# Altium PCB asincronico.PcbDoc
Units mm, origin at the board's own origin, x right, y up, seen from the top; angles counter-clockwise.
Board outline 50.13 x 50.13 mm, 2 copper layers (Top Layer, Bottom Layer); 4 components, 9 nets, 34 pads, 6 vias.
Unrouted connection lines stored in the file: 2.
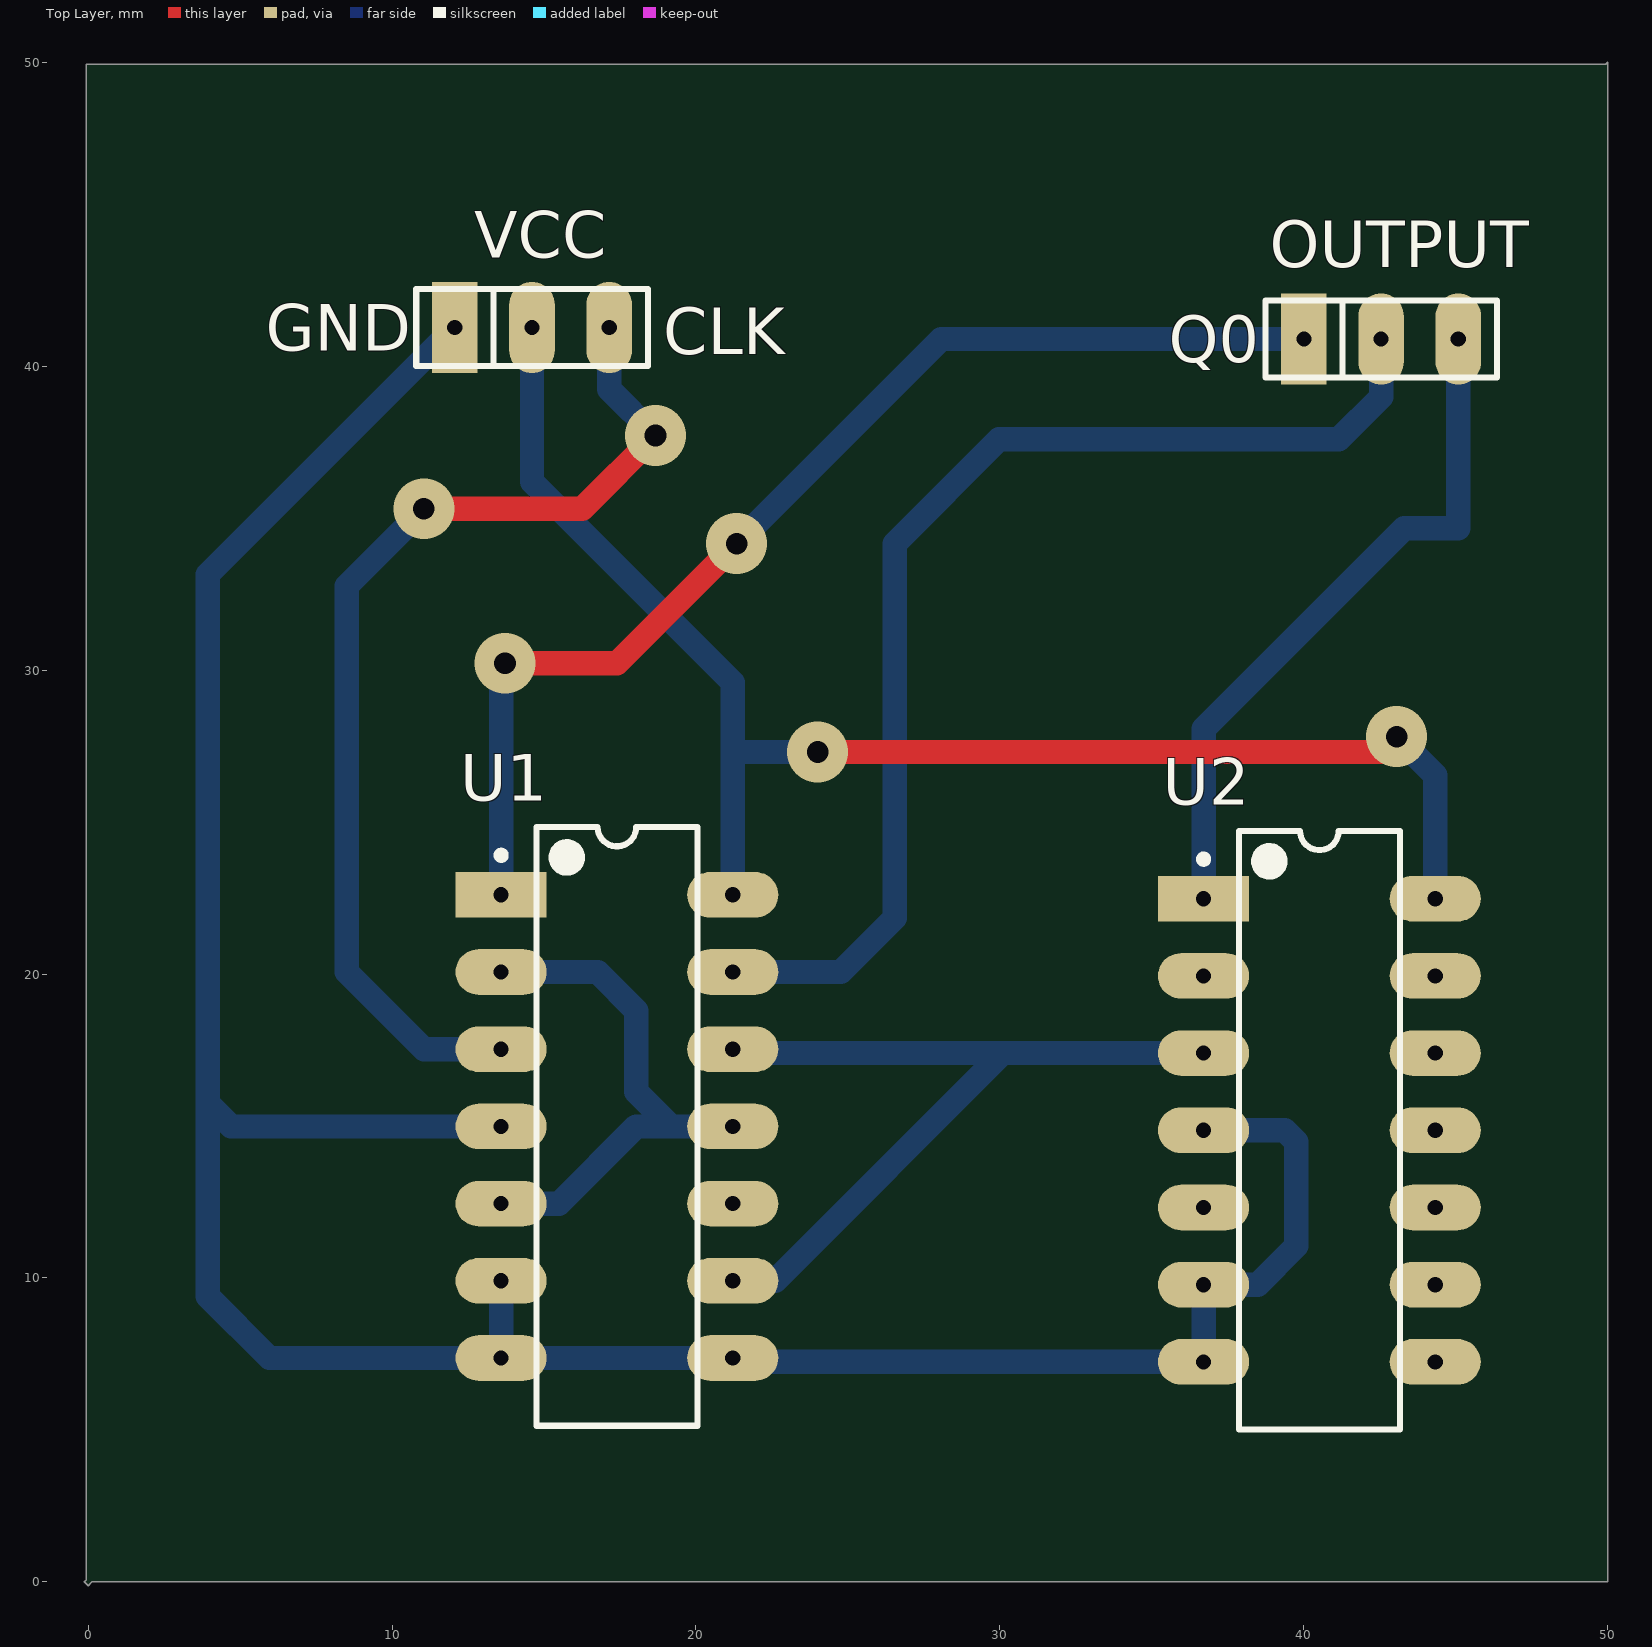
[diagram p0: Top Layer view]
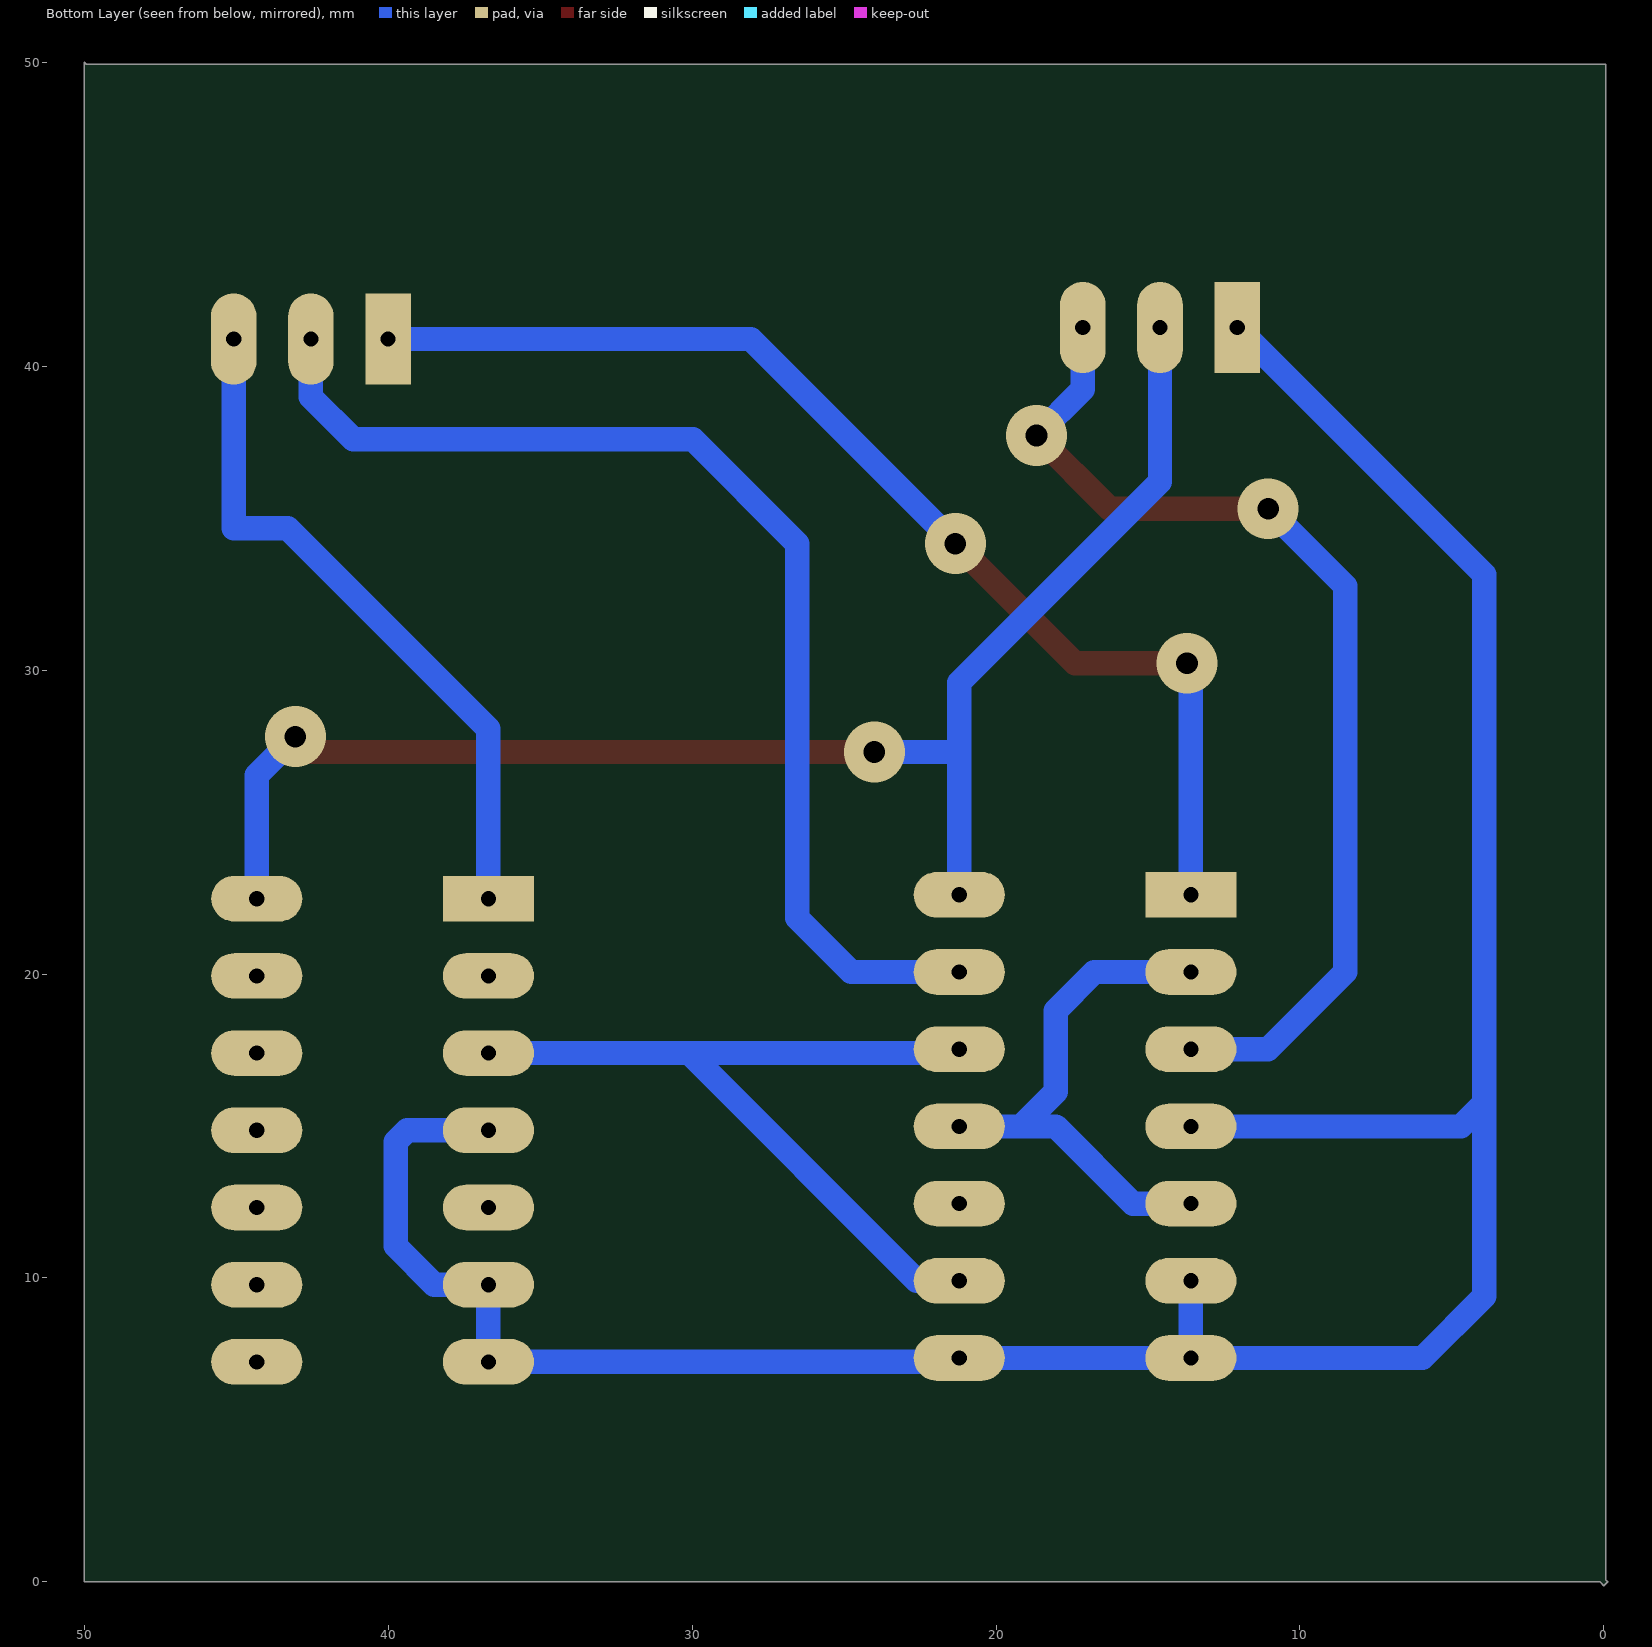
[diagram p1: Bottom Layer view, seen from below]

## Layer stack, top to bottom
Top Solder: solder mask 0.0102, Solder Resist, Dk 3.5
Top Layer: signal copper 0.0356
Dielectric 1: dielectric 0.32, FR-4, Dk 4.8
Bottom Layer: signal copper 0.0356
Bottom Solder: solder mask 0.0102, Solder Resist, Dk 3.5

## Board outline
0,-0.127 0.127,0 50,0 50,50 49.937,49.937 -0.064,49.937 -0.064,0.063 -0.127,0

## Design rules (kind name [scope] priority, off if disabled: settings)
Clearance [All] p1: gap=0.8
PolygonConnect [All] p1: connectstyle=Relief reliefconductorwidth=0.254 reliefentries=4 polygonreliefangle="90 Angle" airgapwidth=0.254
RoutingVias [All] p1: holewidth=0.711 width=3 viastyle="Through Hole" minholewidth=0.711 minwidth=3 maxholewidth=0.711 maxwidth=3
SolderMaskExpansion [All] p1: expansion=0.102
Width [All] p1: maxlimit=0.8 minlimit=0.8 preferedwidth=0.8
30 further rules are at their usual default settings.

## Components (designator, comment, footprint, x,y, rotation, side; value= is the part's Value field where it differs from the comment)
OUTPUT "CON3" SIP3 42.545,40.894 r0 top (schematic designator J5)
U1 "CD4013BCN" N14A 17.399,14.986 r0 top
U2 "CD4013BCN" N14A 40.513,14.859 r0 top
VCC "CON3" SIP3 14.605,41.275 r0 top (schematic designator J4)

## Footprints (in the part's own frame and the unit in brackets; to place one, negate y for a bottom-side part, rotate by r counter-clockwise, add the part's x,y. Pads: shape width x height; smd on the part's side, far side on the other; paste and mask are expansions set on the pad)
N14A [mm] "DIP, 14-Leads, Row Spacing 7.62mm, Pitch 2.54mm, Body 19.18x6.35mm"
  rect 3x1.5 hole 0.5: 1(-3.81,7.62)
  oval 3x1.5 hole 0.5: 2(-3.81,5.08) 3(-3.81,2.54) 4(-3.81,0) 5(-3.81,-2.54) 6(-3.81,-5.08) 7(-3.81,-7.62) 8(3.81,-7.62) 9(3.81,-5.08) 10(3.81,-2.54) 11(3.81,0) 12(3.81,2.54) 13(3.81,5.08) 14(3.81,7.62)
  silkscreen extent -3.93,-9.85 2.65,9.85, body extent -3.55,-9.85 3.55,9.85, height 5.08
SIP3 [mm]
  rect 1.5x3 hole 0.5: 1(-2.54,0)
  oval 1.5x3 hole 0.5: 2(0,0) 3(2.54,0)
  silkscreen extent -3.81,-1.27 3.81,1.27, body extent -3.81,-1.3 3.81,1.24, height 8.38

## Part data
U1 U2: "Dual D-Type Flip-Flop"

## Via types
v1: diameter 2, hole 0.711, Top Layer to Bottom Layer, 6 vias

## Nets (pads, with @x,y where several pads share a name; then routed paths per layer and width w, separated by ;. In a path a pad name is that pad's centre, name@x,y a point inside that pad or via, vN(x,y) a via of type N, cw(c..) or ccw(c..) an arc to the next point about the centre after c; other vN are vias at no path point)
CLK: U1.3 VCC.3 | length 35.2
  Top Layer w0.8: v1(11.049,35.306) 16.256,35.306 v1(18.669,37.719)
  Bottom Layer w0.8: v1(11.049,35.306) 8.509,32.766 8.509,20.066 11.049,17.526 U1.3 ; VCC.3 17.145,39.243 v1(18.669,37.719)
GND: U1.4 U1.6 U1.7 U1.8 U1.10 U2.4 U2.6 U2.7 VCC.1 | length 94.2
  Bottom Layer w0.8: VCC.1 3.937,33.147 3.937,15.748 ; U1.6 U1.7 ; U1.4 4.699,14.986 3.937,15.748 ; U2.4 39.37,14.859 39.751,14.478 39.751,11.049 38.481,9.779 U2.6 U2.7 21.336,7.239 U1.8 U1.7 ; 3.937,15.748 3.937,9.398 5.969,7.366 U1.7
NetU1_2: U1.2 U1.5 U1.11 | length 17.9
  Bottom Layer w0.8: U1.5 15.494,12.446 18.034,14.986 19.177,14.986 ; U1.2 16.764,20.066 18.034,18.796 18.034,16.129 19.177,14.986 ; U1.11 19.177,14.986
NetU1_9: U1.9 U1.12 U2.3 | length 27.5
  Bottom Layer w0.8: U1.9 22.606,9.906 30.099,17.399 ; U1.12 21.336,17.399 30.099,17.399 ; U2.3 30.099,17.399
NetU2_2: U2.2 U2.5
Q0: OUTPUT.1 U1.1 | length 38.4
  Top Layer w0.8: v1(13.716,30.226) 17.399,30.226 v1(21.336,34.163)
  Bottom Layer w0.8: U1.1 13.589,30.099 v1(13.716,30.226) ; v1(21.336,34.163) 28.067,40.894 OUTPUT.1
Q1: OUTPUT.2 U1.13 | length 38.3
  Bottom Layer w0.8: U1.13 24.765,20.066 26.543,21.844 26.543,34.163 29.972,37.592 41.148,37.592 42.545,38.989 OUTPUT.2
Q2: OUTPUT.3 U2.1 | length 22.9
  Bottom Layer w0.8: U2.1 36.703,28.067 43.307,34.671 45.085,34.671 OUTPUT.3
VDD: U1.14 U2.14 VCC.2 | length 49.3
  Top Layer w0.8: v1(24.003,27.305) 42.545,27.305 v1(43.053,27.813)
  Bottom Layer w0.8: VCC.2 14.605,36.195 21.209,29.591 21.209,27.305 ; U1.14 21.209,27.305 ; v1(24.003,27.305) 21.209,27.305 ; v1(43.053,27.813) 44.323,26.543 U2.14
pads on no net: U2.8 U2.9 U2.10 U2.11 U2.12 U2.13

## Silkscreen, mask and mechanical layers (free items; w line width, h text height)
Top Overlay:
  text "GND" at 5.842,40.513 h1.52
  text "CLK" at 18.923,40.386 h1.52
  text "Q0" at 35.56,40.132 h1.52